# Altium PCB BEE-PC_EXP_V100.PcbDoc (part 6 of 7)
Units mm, origin at the board's own origin, x right, y up, seen from the top; angles counter-clockwise.
Board outline 180 x 79.98 mm, 6 copper layers (L1 TOP, L2 GND 1, L3 SIGNAL, L4 PWR, L5 GND 2, L6 BOT), stack 1.536 mm thick; 1146 components, 909 nets, 3933 pads, 1234 vias.
Unrouted connection lines stored in the file: 1783.
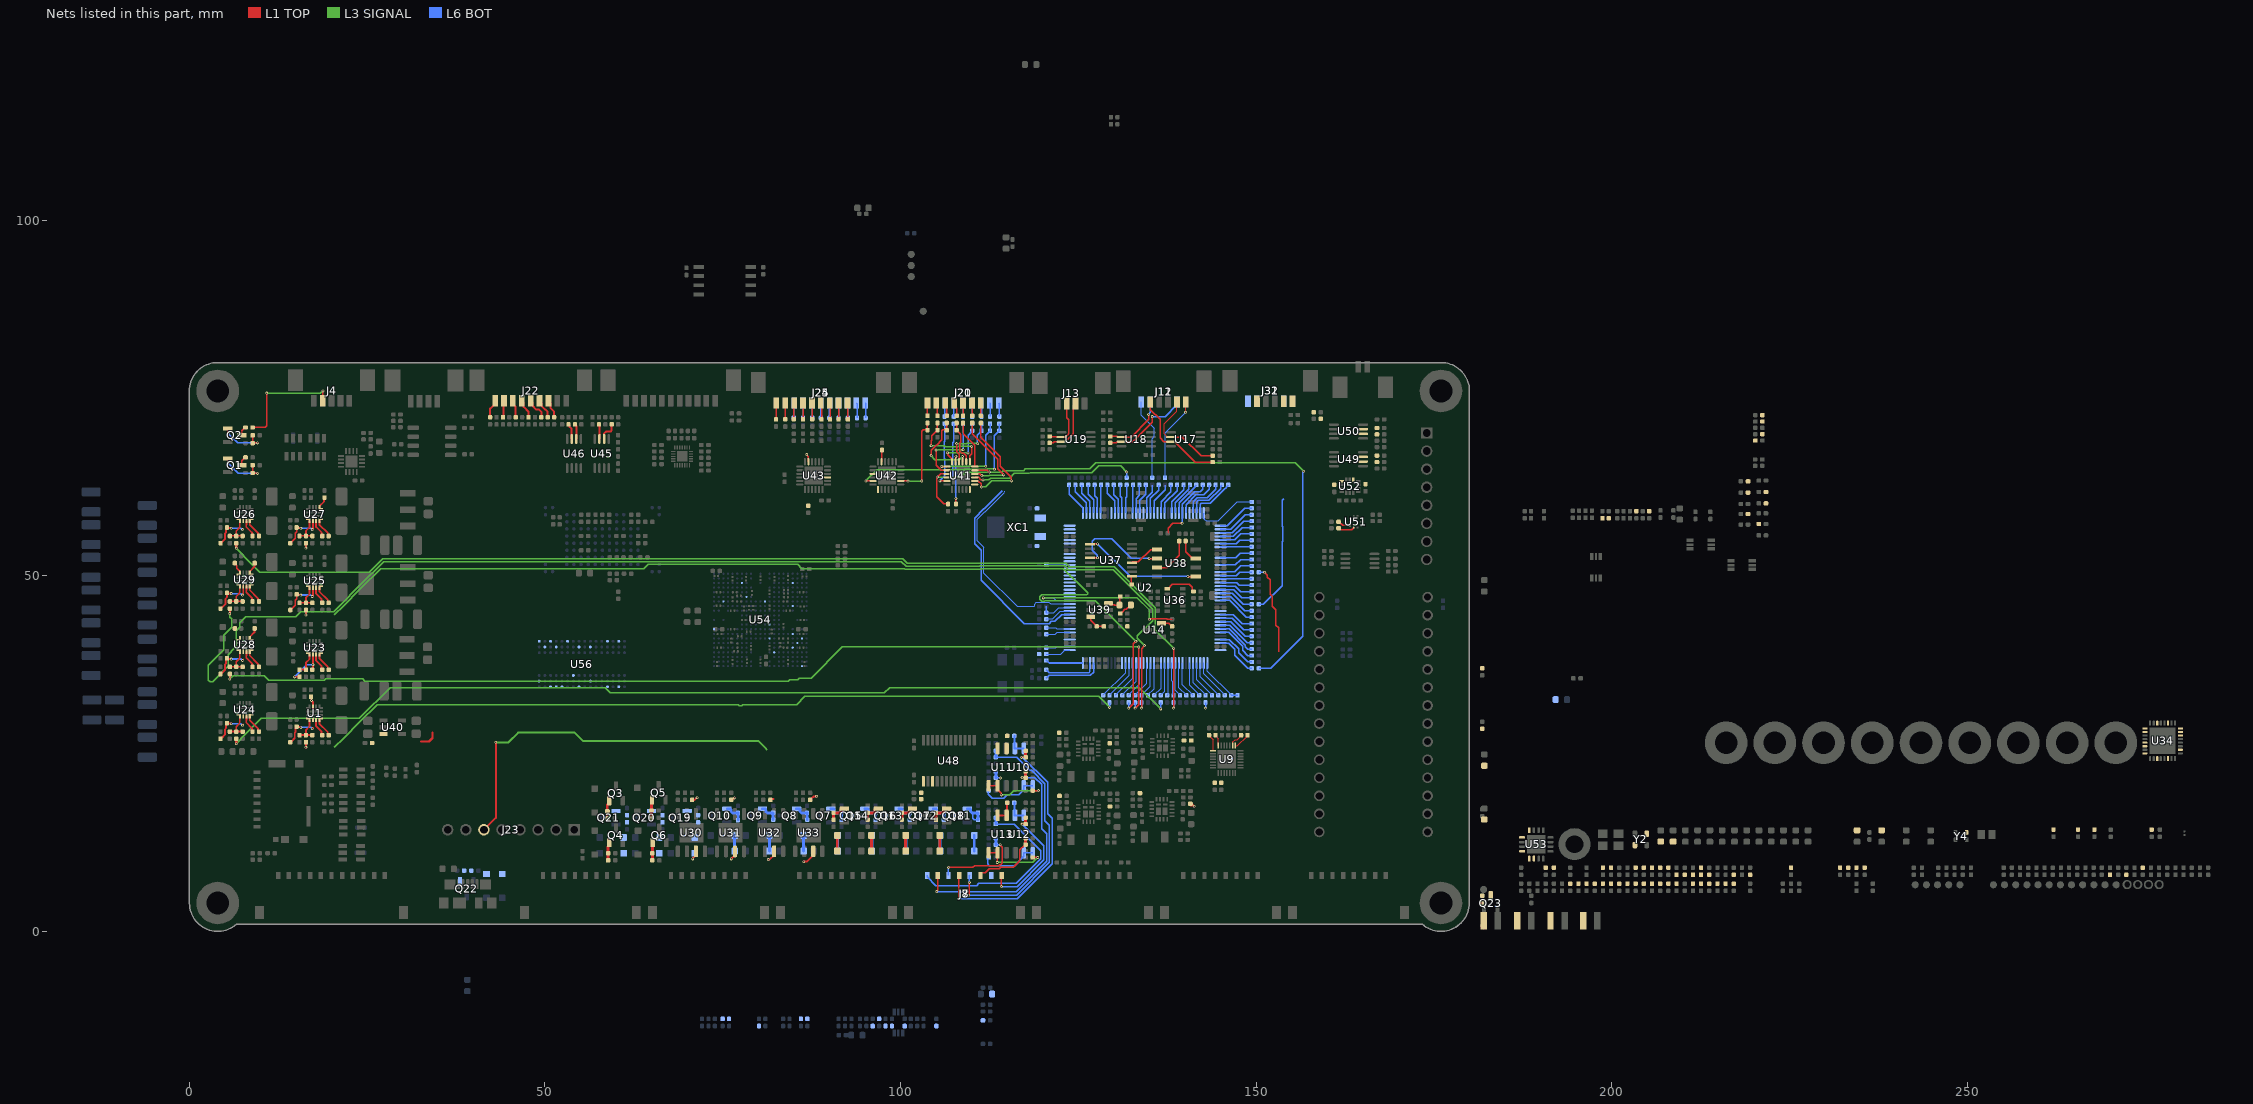
[diagram p6: the nets of this part, all layers, seen from the top]

## Via types
v1: diameter 0.6, hole 0.3, L1 TOP to L6 BOT, 563 vias
v2: diameter 0.4, hole 0.2, L1 TOP to L6 BOT, tented both sides, 344 vias
v3: diameter 0.4, hole 0.2, L1 TOP to L6 BOT, 327 vias

## Nets (pads, with @x,y where several pads share a name; then routed paths per layer and width w, separated by ;. In a path a pad name is that pad's centre, name@x,y a point inside that pad or via, vN(x,y) a via of type N, cw(c..) or ccw(c..) an arc to the next point about the centre after c; other vN are vias at no path point) (continued)
NetC167_2: C167.2 U27.7 | length 1.7
  L1 TOP w0.25: U27.7@18.308,59.609 18.333,59.634 18.333,59.833 18.954,60.454 18.954,60.929 C167.2@19,60.975
NetC168_2: C168.2 U28.10
NetC169_2: C169.2 U28.7 | length 1.7
  L1 TOP w0.25: U28.7@8.508,41.209 8.533,41.234 8.533,41.433 9.154,42.054 9.154,42.529 C169.2@9.2,42.575
NetC173_2: C173.2 U29.10 | length 1.7
  L1 TOP w0.25: C173.2@6.4,51.775 6.4,51.736 6.685,51.451 6.685,51.073 7.083,50.675 7.083,50.434 U29.10@7.108,50.409
NetC174_2: C174.2 U29.7 | length 1.7
  L1 TOP w0.25: U29.7@8.508,50.409 8.533,50.434 8.533,50.633 9.154,51.254 9.154,51.729 C174.2@9.2,51.775
NetC287_2: C287.2 R581.2
NetC288_1: C288.1 U34.24
NetC290_2: C290.2 R323.1 R394.1 R571.1 R581.1 U34.2 U54.J7
NetC292_2: C292.2 C294.2 U56.B2
NetC296_2: C296.2 U56.D9
NetC298_2: C298.2 U56.G7
NetC300_2: C300.2 U56.K8
NetC302_2: C302.2 U56.K2
NetC304_2: C304.2 U56.R9
NetC306_2: C306.2 U56.R1
NetC308_2: C308.2 U56.N9
NetC310_2: C310.2 U56.N1
NetC312_2: C312.2 U56.A1
NetC314_2: C314.2 U56.A8
NetC316_2: C316.2 U56.C1
NetC318_2: C318.2 U56.C9
NetC320_2: C320.2 U56.D2
NetC322_2: C322.2 U56.E9
NetC324_2: C324.2 U56.F1
NetC326_2: C326.2 U56.H2
NetC328_2: C328.2 C330.2 U56.H9
NetD17_2: D17.2 DZ1.2 | length 2.2
  L6 BOT w0.4: D17.2@91.181,11.303 DZ1.2@91.181,13.503
NetD18_2: D18.2 DZ2.2 | length 2.2
  L6 BOT w0.4: D18.2@86.381,11.303 DZ2.2@86.381,13.503
NetD19_2: D19.2 DZ3.2 | length 2.2
  L6 BOT w0.4: D19.2@81.581,11.303 DZ3.2@81.581,13.503
NetD20_2: D20.2 DZ4.2 | length 2.2
  L6 BOT w0.4: D20.2@76.681,11.303 DZ4.2@76.681,13.503
NetD21_2: D21.2 DZ5.2 | length 2.2
  L6 BOT w0.4: D21.2@110.381,11.303 DZ5.2@110.381,13.503
NetD22_2: D22.2 DZ6.2 | length 2.2
  L6 BOT w0.4: D22.2@105.581,11.303 DZ6.2@105.581,13.503
NetD23_2: D23.2 DZ7.2 | length 2.2
  L6 BOT w0.4: D23.2@100.781,11.303 DZ7.2@100.781,13.503
NetD24_2: D24.2 DZ8.2 | length 2.2
  L6 BOT w0.4: D24.2@95.981,11.303 DZ8.2@95.981,13.503
NetD25_2: D25.2 DZ9.2 | length 2.2
  L1 TOP w0.4: D25.2@91.119,11.303 DZ9.2@91.119,13.503
NetD26_2: D26.2 DZ10.2 | length 2.2
  L1 TOP w0.4: D26.2@95.919,11.303 DZ10.2@95.919,13.503
NetD27_2: D27.2 DZ11.2 | length 2.2
  L1 TOP w0.4: D27.2@100.719,11.303 DZ11.2@100.719,13.503
NetD28_2: D28.2 DZ12.2 | length 2.2
  L1 TOP w0.4: D28.2@105.519,11.303 DZ12.2@105.519,13.503
NetD29_2: D29.2 DZ13.2
NetD30_2: D30.2 DZ14.2
NetD31_2: D31.2 DZ15.2
NetD32_2: D32.2 DZ16.2
NetD33_1: D33.1 R166.2
NetD34_1: D34.1 R577.2
NetD35_1: D35.1 R579.2
NetJ4_4: J4.4 R92.2 | length 16.1
  L1 TOP w0.2: R92.2@8.925,70.864 10.664,70.864 10.9,71.1 v3(10.9,75.7) ; J4.4@18.75,74.6 18.8,74.65 v3(18.8,76)
  L3 SIGNAL w0.2: v3(10.9,75.7) 18.446,75.7 18.746,76 v3(18.8,76)
NetJ11_1: J11.1 R169.1 | length 11.8
  L1 TOP w0.15: v3(140.1,73) 140.1,74.425 J11.1@140.125,74.45
  L6 BOT w0.15: R169.1@137.2,63.825 137.2,70.1 v3(140.1,73)
NetJ11_2: J11.2 R172.2 U17.6 | length 13.3
  L1 TOP w0.15: U17.6@138.05,69.525 137.525,69.525 137.075,69.975 137.075,70.675 137.1,70.7 137.1,71.4 138.875,73.175 J11.2@138.875,74.45
  L1 TOP w0.2: U17.6@138.05,69.525 139.653,69.525 142.278,66.9 R172.2@143.875,66.9
NetJ11_5: J11.5 R173.2 U17.7 | length 14.4
  L1 TOP w0.2: J11.5@135.125,74.45 135.125,73.375 136.5,72 136.5,70.4 136.5,69.425 137.05,68.875 138.597,68.875 141.472,66 R173.2@143.875,66
NetJ12_1: J12.1 R179.1 | length 11.5
  L6 BOT w0.15: J12.1@133.875,74.45 133.875,72.575 135.7,70.75 135.7,69.6 135.4,69.3 R179.1@135.4,63.825
NetJ12_2: J12.2 R180.2 U18.6 | length 9
  L1 TOP w0.2: R180.2@129.525,69.6 130.462,69.6 130.537,69.525 U18.6@131.102,69.525 132.425,69.525 134.9,72 v3(134.9,72.7)
  L6 BOT w0.2: v3(134.9,72.7) 134.9,72.754 135.125,72.979 J12.2@135.125,74.45
NetJ12_5: J12.5 R181.2 U18.7 | length 12.4
  L1 TOP w0.2: R181.2@129.525,68.7 130.362,68.7 130.537,68.875 U18.7@131.102,68.875 132.675,68.875 135.4,71.6 v3(135.4,72.4)
  L6 BOT w0.2: v3(135.4,72.4) 137.225,72.4 138.875,74.05 J12.5@138.875,74.45
NetJ13_2: J13.2 R183.2 U19.7 | length 7.7
  L1 TOP w0.2: R183.2@121.007,68.7 121.478,68.7 121.65,68.872 122.647,68.872 U19.7@122.65,68.875 ; U19.7@123.197,68.875 124.301,69.979 124.301,72.941 124.319,72.959 124.319,73.944 J13.2@124.625,74.25
NetJ13_3: J13.3 R184.2 U19.6 | length 7.2
  L1 TOP w0.2: R184.2@121.007,69.6 121.054,69.554 123.168,69.554 123.197,69.525 123.65,69.978 123.65,71.939 123.375,72.214 J13.3@123.375,74.25
NetJ20_3: J20.3 R408.2 | length 1.9
  L6 BOT w0.2: R408.2@106.2,72.425 106.2,74.2 J20.3@106.3,74.3
NetJ20_4: J20.4 R410.2 | length 1.9
  L6 BOT w0.2: R410.2@107.5,72.425 107.5,74.25 J20.4@107.55,74.3
NetJ20_5: J20.5 R412.2 | length 1.9
  L6 BOT w0.2: R412.2@108.8,72.425 J20.5@108.8,74.3
NetJ20_6: J20.6 R414.2 | length 1.9
  L6 BOT w0.2: J20.6@110.05,74.3 110.1,74.25 R414.2@110.1,72.425
NetJ20_7: J20.7 R416.2 | length 1.9
  L6 BOT w0.2: J20.7@111.3,74.3 111.4,74.2 R416.2@111.4,72.425
NetJ20_8: J20.8 R418.2 | length 1.9
  L6 BOT w0.2: J20.8@112.55,74.3 112.6,74.25 R418.2@112.6,72.425
NetJ20_9: J20.9 R420.2 | length 1.9
  L6 BOT w0.2: J20.9@113.8,74.3 113.9,74.2 R420.2@113.9,72.425
NetJ21_3: J21.3 R409.2 | length 1.8
  L1 TOP w0.2: R409.2@111.3,72.525 J21.3@111.3,74.3
NetJ21_4: J21.4 R411.2 | length 1.8
  L1 TOP w0.2: J21.4@110.05,74.3 110.1,74.25 R411.2@110.1,72.525
NetJ21_5: J21.5 R413.2 | length 1.8
  L1 TOP w0.2: R413.2@108.8,72.525 J21.5@108.8,74.3
NetJ21_6: J21.6 R415.2 | length 1.9
  L1 TOP w0.2: J21.6@107.55,74.3 107.55,73.9 107.9,73.55 R415.2@107.9,72.525
NetJ21_7: J21.7 R417.2 | length 1.9
  L1 TOP w0.2: J21.7@106.3,74.3 106.5,74.1 R417.2@106.5,72.525
NetJ21_8: J21.8 R419.2 | length 1.8
  L1 TOP w0.2: J21.8@105.05,74.3 105.2,74.15 R419.2@105.2,72.525
NetJ21_9: J21.9 R421.2 | length 1.8
  L1 TOP w0.2: R421.2@103.8,72.525 J21.9@103.8,74.3
NetJ22_3: J22.3 R307.2 | length 2.6
  L1 TOP w0.28: J22.3@50.5,74.6 50.76,74.34 50.76,73.61 51.3,73.07 R307.2@51.3,72.325
NetJ22_4: J22.4 R309.2 | length 2.8
  L1 TOP w0.28: J22.4@49.25,74.6 49.51,74.34 49.51,73.909 50.055,73.365 50.105,73.365 50.4,73.07 R309.2@50.4,72.325
NetJ22_5: J22.5 R311.2 | length 3.1
  L1 TOP w0.28: J22.5@48,74.6 48.26,74.34 48.26,73.909 48.805,73.365 49.205,73.365 49.5,73.07 R311.2@49.5,72.325
NetJ22_6: J22.6 R313.2 | length 2.7
  L1 TOP w0.28: J22.6@46.75,74.6 47.01,74.34 47.01,73.76 47.7,73.07 R313.2@47.7,72.325
NetJ22_7: J22.7 R315.2 | length 2.4
  L1 TOP w0.28: J22.7@45.5,74.6 45.5,74.2 45.9,73.8 R315.2@45.9,72.325
NetJ22_8: J22.8 R316.2 | length 2.3
  L1 TOP w0.28: R316.2@44.1,72.325 44.175,72.4 44.175,74.525 J22.8@44.25,74.6
NetJ22_9: J22.9 R317.2 | length 2.6
  L1 TOP w0.28: R317.2@42.3,72.325 42.3,73.5 43,74.2 J22.9@43,74.6
NetJ24_3: J24.3 R431.2 | length 2.3
  L1 TOP w0.2: J24.3@92.55,74.3 92.6,74.25 R431.2@92.6,72.025
NetJ24_4: J24.4 R433.2 | length 2.3
  L1 TOP w0.2: R433.2@91.3,72.025 J24.4@91.3,74.3
NetJ24_5: J24.5 R435.2 | length 2.3
  L1 TOP w0.2: J24.5@90.05,74.3 90.1,74.25 R435.2@90.1,72.025
NetJ24_6: J24.6 R437.2 | length 2.3
  L1 TOP w0.2: J24.6@88.8,74.3 88.9,74.2 R437.2@88.9,72.025
NetJ24_7: J24.7 R439.2 | length 2.3
  L1 TOP w0.2: J24.7@87.55,74.3 87.6,74.25 R439.2@87.6,72.025
NetJ24_8: J24.8 R441.2 | length 2.3
  L1 TOP w0.2: R441.2@86.3,72.025 J24.8@86.3,74.3
NetJ24_9: J24.9 R443.2 | length 2.3
  L1 TOP w0.2: R443.2@85,72.025 85,74.25 J24.9@85.05,74.3
NetJ24_10: J24.10 R445.2 | length 2.3
  L1 TOP w0.2: R445.2@83.8,72.025 J24.10@83.8,74.3
NetJ24_11: J24.11 R447.2 | length 2.3
  L1 TOP w0.2: R447.2@82.5,72.025 82.5,74.25 J24.11@82.55,74.3
NetJ25_3: J25.3 R432.2 | length 2.1
  L6 BOT w0.2: R432.2@85,72.225 85,74.25 J25.3@85.05,74.3
NetJ25_4: J25.4 R434.2 | length 2.1
  L6 BOT w0.2: R434.2@86.3,72.225 J25.4@86.3,74.3
NetJ25_5: J25.5 R436.2 | length 2.1
  L6 BOT w0.2: J25.5@87.55,74.3 87.6,74.25 R436.2@87.6,72.225
NetJ25_6: J25.6 R438.2 | length 2.1
  L6 BOT w0.2: R438.2@88.8,72.225 J25.6@88.8,74.3
NetJ25_7: J25.7 R440.2 | length 2.1
  L6 BOT w0.2: R440.2@90,72.225 90,74.25 J25.7@90.05,74.3
NetJ25_8: J25.8 R442.2 | length 2.1
  L6 BOT w0.2: R442.2@91.3,72.225 J25.8@91.3,74.3
NetJ25_9: J25.9 R444.2 | length 2.1
  L6 BOT w0.2: J25.9@92.55,74.3 92.6,74.25 R444.2@92.6,72.225
NetJ25_10: J25.10 R446.2 | length 2.1
  L6 BOT w0.2: J25.10@93.8,74.3 93.9,74.2 R446.2@93.9,72.225
NetJ25_11: J25.11 R448.2 | length 2.1
  L6 BOT w0.2: J25.11@95.05,74.3 95.1,74.25 R448.2@95.1,72.225
NetJ31_1: J31.1 R81.1
NetJ31_2: J31.2 R101.2 U49.6
NetJ31_5: J31.5 R102.2 U49.7
NetJ32_1: J32.1 R112.1
NetJ32_2: J32.2 R505.2 U50.6
NetJ32_5: J32.5 R506.2 U50.7
NetJP12_1: JP12.1 R401.2 | length 2
  L1 TOP w0.2: R401.2@130.875,44.7 130.927,44.7 131.127,44.9 131.164,44.9 131.564,45.3 131.775,45.3 JP12.1@132.375,45.9
NetJP12_2: JP12.2 R402.2 U39.3 | length 2.9
  L1 TOP w0.2: U39.3@129.255,46.15 129.45,45.955 130.045,45.955 130.1,45.9 130.825,45.9 130.85,45.925 130.85,47.075 R402.2@130.875,47.1
NetL5_1: L5.1 U34.11
NetL6_1: L6.1 U34.14
NetL7_1: L7.1 U34.27
NetL8_1: L8.1 U34.30
NetQ1_1: Q1.1 R85.2 R86.2 | length 7.3
  L1 TOP w0.2: v3(5.4,65.9) Q1.1@5.4,66.514 ; R86.2@8.875,65.564 8.9,65.539 8.9,64.489 8.925,64.464 8.957,64.432 9.568,64.432 v3(9.6,64.4)
  L6 BOT w0.2: v3(5.4,65.9) 6.9,64.4 v3(9.6,64.4)
NetQ1_3: Q1.3 R87.1 | length 1.3
  L1 TOP w0.2: Q1.3@7.4,65.564 7.4,66.187 7.875,66.662 R87.1@7.875,66.664
NetQ2_1: Q2.1 R90.2 R91.2 | length 7.2
  L1 TOP w0.2: Q2.1@5.4,70.714 5.4,70.154 5.5,70.054 v3(5.5,70) ; R91.2@8.875,69.764 8.9,69.739 8.9,68.689 8.925,68.664 8.943,68.682 9.582,68.682 v3(9.6,68.7)
  L6 BOT w0.2: v3(5.5,70) 6.8,68.7 v3(9.6,68.7)
NetQ2_3: Q2.3 R92.1 | length 1.3
  L1 TOP w0.2: Q2.3@7.4,69.764 7.4,70.387 7.875,70.862 R92.1@7.875,70.864
NetQ3_1: Q3.1 R125.2 R126.2 | length 2.6
  L1 TOP w0.4: R125.2@58.775,15.9 58.775,16.9 58.775,17.765 59.05,18.04 Q3.1@59.05,18.4
NetQ4_1: Q4.1 R127.2 R128.2 | length 2.6
  L1 TOP w0.4: R127.2@58.875,10 58.875,11.965 58.95,12.04 58.95,12.4 Q4.1@59.05,12.5
NetQ5_1: Q5.1 R129.2 R130.2 | length 2.5
  L1 TOP w0.4: R129.2@64.975,16 65.013,16.038 65.013,18.463 Q5.1@65.05,18.5
NetQ6_1: Q6.1 R131.2 R132.2 | length 2.5
  L1 TOP w0.4: R131.2@65.075,10 65.113,10.038 65.113,12.463 Q6.1@65.15,12.5
NetQ7_1: Q7.1 R479.1 R483.2 | length 2.8
  L6 BOT w0.4: Q7.1@90.2,17.25 90.56,17.25 90.66,17.15 90.66,16.909 90.894,16.675 91.7,16.675 R483.2@91.7,15.725
NetQ8_1: Q8.1 R480.1 R484.2 | length 2.8
  L6 BOT w0.4: Q8.1@85.4,17.25 85.76,17.25 85.86,17.15 85.86,16.909 86.094,16.675 86.9,16.675 R484.2@86.9,15.725
NetQ9_1: Q9.1 R481.1 R485.2 | length 2.8
  L6 BOT w0.4: Q9.1@80.6,17.25 80.96,17.25 81.06,17.15 81.06,16.909 81.294,16.675 82.1,16.675 R485.2@82.1,15.725
NetQ10_1: Q10.1 R482.1 R486.2 | length 2.8
  L6 BOT w0.4: Q10.1@75.7,17.25 76.06,17.25 76.16,17.15 76.16,16.909 76.394,16.675 77.2,16.675 R486.2@77.2,15.725
NetQ11_1: Q11.1 R487.1 R491.2 | length 5
  L6 BOT w0.2: R491.2@110.9,15.725 110.366,15.725 110.183,15.907 110.183,16.558 110.3,16.675 R487.1@110.9,16.675
  L6 BOT w0.4: Q11.1@109.4,17.25 109.76,17.25 109.86,17.15 109.86,16.909 110.094,16.675 110.9,16.675 R491.2@110.9,15.725
NetQ12_1: Q12.1 R488.1 R492.2 | length 2.8
  L6 BOT w0.4: Q12.1@104.6,17.25 104.96,17.25 105.06,17.15 105.06,16.909 105.294,16.675 106.1,16.675 R492.2@106.1,15.725
NetQ13_1: Q13.1 R489.1 R493.2 | length 2.8
  L6 BOT w0.4: Q13.1@99.8,17.25 100.16,17.25 100.26,17.15 100.26,16.909 100.494,16.675 101.3,16.675 R493.2@101.3,15.725
NetQ14_1: Q14.1 R490.1 R494.2 | length 2.8
  L6 BOT w0.4: Q14.1@95,17.25 95.36,17.25 95.46,17.15 95.46,16.909 95.694,16.675 96.5,16.675 R494.2@96.5,15.725
NetQ15_1: Q15.1 R495.1 R499.2 | length 2.8
  L1 TOP w0.4: R499.2@90.6,15.725 90.6,16.675 91.406,16.675 91.64,16.909 91.64,17.15 91.74,17.25 Q15.1@92.1,17.25
NetQ16_1: Q16.1 R496.1 R500.2 | length 2.8
  L1 TOP w0.4: R500.2@95.4,15.725 95.4,16.675 96.206,16.675 96.44,16.909 96.44,17.15 96.54,17.25 Q16.1@96.9,17.25
NetQ17_1: Q17.1 R497.1 R501.2 | length 2.8
  L1 TOP w0.4: R501.2@100.2,15.725 100.2,16.675 101.006,16.675 101.24,16.909 101.24,17.15 101.34,17.25 Q17.1@101.7,17.25
NetQ18_1: Q18.1 R498.1 R502.2 | length 2.8
  L1 TOP w0.4: R502.2@105,15.725 105,16.675 105.806,16.675 106.04,16.909 106.04,17.15 106.14,17.25 Q18.1@106.5,17.25
NetQ19_1: Q19.1 R508.1 R512.2
NetQ20_1: Q20.1 R509.1 R513.2
NetQ21_1: Q21.1 R510.1 R514.2
NetQ22_1: Q22.1 R511.1 R515.2
NetQ23_3: Q23.3 R331.1 Y2.1
NetR1_1: R1.1 R6.2 U1.2 | length 5.1
  L1 TOP w0.25: 14.794,27.165 14.825,27.196 14.825,27.947 14.953,28.075 14.953,28.628 R1.1@15.1,28.775 ; R1.1@15.1,28.764 15.135,28.729 15.671,28.729 v2(15.7,28.7) ; v2(17.3,28.5) 17.3,28.541 v2@17.384,28.624
  L1 TOP w0.28: R6.2@14.2,26.575 14.2,26.595 14.38,26.775 14.404,26.775 14.794,27.165
  L6 BOT w0.25: v2(15.7,28.7) 17.059,28.7 17.259,28.5 v2(17.3,28.5)
NetR2_1: R2.1 U1.3 | length 2.5
  L1 TOP w0.25: U1.3@17.833,29.759 17.833,29.192 17.825,29.184 17.825,28.875 18.604,28.096 18.604,27.721 R2.1@18.7,27.625
NetR3_1: R3.1 U1.4 | length 2.7
  L1 TOP w0.25: U1.4@18.308,29.759 18.293,29.744 18.293,29.207 19.454,28.046 19.454,27.771 R3.1@19.6,27.625
NetR4_1: R4.1 R5.1 R7.1 U1.1 | length 4.2
  L1 TOP w0.25: R5.1@15.5,27.625 R4.1@16.4,27.625 ; U1.1@16.908,29.762 16.9,29.754 16.9,28.812 16.392,28.304 16.392,27.625 R7.1@17.3,27.625
NetR119_2: R119.2 U9.23 | length 2.1
  L1 TOP w0.15: U9.23@146.7,26.135 146.715,26.15 146.715,26.647 147.043,26.975 147.326,26.975 147.9,27.549 R119.2@147.9,27.575
NetR120_2: R120.2 U9.28 | length 1.6
  L1 TOP w0.15: R120.2@144.3,27.575 144.3,27.509 144.69,27.119 144.69,26.885 144.7,26.875 U9.28@144.7,26.135
NetR121_2: R121.2 U9.22 | length 2.3
  L1 TOP w0.15: U9.22@147.1,26.135 147.386,26.135 148.8,27.549 R121.2@148.8,27.575
NetR122_2: R122.2 U9.1 | length 2.4
  L1 TOP w0.15: R122.2@143.4,27.575 143.4,27.549 143.965,26.984 U9.1@143.965,25.4
NetR133_1: R133.1 U10.1 U10.2 | length 8
  L6 BOT w0.2: R133.1@112.375,19.8 112.375,19.3 112.925,18.75 114.489,18.75 114.989,19.25 116.645,19.25 117.335,19.94 U10.2@117.335,20.465 U10.1@118.605,20.465
NetR134_1: R134.1 U11.1 U11.2 | length 9
  L1 TOP w0.2: U11.1@112.395,20.465 U11.2@113.665,20.465 113.665,19.94 114.162,19.443 114.162,19.238 v3(114.2,19.2) ; R134.1@118.625,19.8 v3(119.4,19.8)
  L3 SIGNAL w0.2: v3(114.2,19.2) 115.364,19.2 115.964,19.8 v3(119.4,19.8)
NetR139_1: R139.1 U10.6 U10.7 | length 3
  L6 BOT w0.28: R139.1@116.025,27.5 116.045,27.48 U10.6@116.045,25.755 ; U10.6@116.065,25.735 U10.7@117.335,25.735
NetR140_1: R140.1 U11.6 U11.7
NetR145_1: R145.1 U12.1 U12.2 | length 8.5
  L6 BOT w0.2: R145.1@112.375,10.4 112.25,10.275 112.25,9.514 112.514,9.25 116.045,9.25 117.335,10.54 U12.2@117.335,11.065 U12.1@118.605,11.065
NetR146_1: R146.1 U13.1 U13.2 | length 9.3
  L1 TOP w0.2: U13.1@112.395,11.065 U13.2@113.665,11.065 113.632,11.032 113.632,9.733 v3(113.6,9.7) ; R146.1@118.625,10.4 v3(119.3,10.4)
  L3 SIGNAL w0.2: v3(113.6,9.7) 118.6,9.7 v3(119.3,10.4)
NetR151_1: R151.1 U12.6 U12.7 | length 3
  L6 BOT w0.28: R151.1@116.025,18.1 116.045,18.08 U12.6@116.045,16.355 ; U12.6@116.065,16.335 U12.7@117.335,16.335
NetR152_1: R152.1 U13.6 U13.7 | length 3.1
  L1 TOP w0.28: U13.7@113.665,16.335 U13.6@114.935,16.335 114.955,16.355 114.955,18.08 R152.1@114.975,18.1
NetR157_1: R157.1 U14.2 | length 1.7
  L1 TOP w0.2: U14.2@136.7,43.35 137.723,43.35 138.198,42.875 R157.1@138.2,42.875
NetR167_1: R167.1 U34.22
NetR217_1: R217.1 R220.2 U23.1 | length 3.2
  L1 TOP w0.25: R220.2@15.5,36.825 16.4,36.825 16.4,37.8 16.9,38.3 16.9,38.954 U23.1@16.908,38.962
NetR218_1: R218.1 U23.3 | length 2.5
  L1 TOP w0.25: U23.3@17.833,38.959 17.833,38.392 17.825,38.384 17.825,38.075 18.604,37.296 18.604,36.921 R218.1@18.7,36.825
NetR219_1: R219.1 U23.4 | length 2.7
  L1 TOP w0.25: U23.4@18.308,38.959 18.293,38.944 18.293,38.407 19.454,37.246 19.454,36.971 R219.1@19.6,36.825
NetR220_1: R220.1 R221.2 U23.2 | length 6.2
  L1 TOP w0.2: v3(14.8,35.8) 14.813,35.788 15.487,35.788 R220.1@15.5,35.775
  L1 TOP w0.25: R221.2@17.3,36.825 17.385,36.91 v3@17.385,37.505 ; U23.2@17.384,38.962 17.384,38.689 17.385,38.687 v3@17.385,37.505 ; v3(17.385,37.498) v3@17.385,37.505
  L6 BOT w0.2: v3(14.8,35.8) 16.498,37.498 v3(17.385,37.498)
NetR222_1: R222.1 R228.2 U24.2 | length 5.1
  L1 TOP w0.25: 4.994,27.665 5.025,27.696 5.025,28.447 5.153,28.575 5.153,29.117 R222.1@5.3,29.264 ; R222.1@5.3,29.275 R222.1@5.3,29.264 ; v2(5.9,29.2) 5.871,29.229 5.335,29.229 R222.1@5.3,29.264 ; v2(7.5,29) 7.5,29.041 v2@7.584,29.124
  L1 TOP w0.28: R228.2@4.4,27.075 4.4,27.095 4.58,27.275 4.604,27.275 4.994,27.665
  L6 BOT w0.25: v2(5.9,29.2) 7.259,29.2 7.459,29 v2(7.5,29)
NetR223_1: R223.1 U24.3 | length 2.5
  L1 TOP w0.25: U24.3@8.033,30.259 8.033,29.692 8.025,29.684 8.025,29.375 8.804,28.596 8.804,28.221 R223.1@8.9,28.125
NetR224_1: R224.1 U24.4 | length 2.7
  L1 TOP w0.25: U24.4@8.508,30.259 8.493,30.244 8.493,29.707 9.654,28.546 9.654,28.271 R224.1@9.8,28.125
NetR225_1: R225.1 R227.1 R229.1 U24.1 | length 4.2
  L1 TOP w0.25: R227.1@5.7,28.125 R225.1@6.6,28.125 ; U24.1@7.108,30.262 7.1,30.254 7.1,29.312 6.592,28.804 6.592,28.125 R229.1@7.5,28.125
NetR231_1: R231.1 R241.2 U25.2 | length 6.2
  L1 TOP w0.25: 14.828,45.8 14.885,45.857 ; 14.885,45.857 14.885,46.593 15.1,46.808 R231.1@15.1,47.345 ; R231.1@15.1,47.364 15.135,47.329 15.671,47.329 v2(15.7,47.3) ; v2(17.3,47.1) 17.3,47.141 17.384,47.224 U25.2@17.384,48.362
  L1 TOP w0.28: R241.2@14.2,45.175 14.2,45.195 14.38,45.375 14.404,45.375 14.828,45.8
  L6 BOT w0.25: v2(15.7,47.3) 17.059,47.3 17.259,47.1 v2(17.3,47.1)
NetR232_1: R232.1 R242.2 U26.2 | length 5.1
  L1 TOP w0.25: 4.994,55.165 5.025,55.196 5.025,55.947 5.153,56.075 5.153,56.617 R232.1@5.3,56.764 ; R232.1@5.3,56.775 R232.1@5.3,56.764 ; v2(5.9,56.7) 5.871,56.729 5.335,56.729 R232.1@5.3,56.764 ; v2(7.5,56.5) 7.5,56.541 v2@7.584,56.624
  L1 TOP w0.28: R242.2@4.4,54.575 4.4,54.595 4.58,54.775 4.604,54.775 4.994,55.165
  L6 BOT w0.25: v2(5.9,56.7) 7.259,56.7 7.459,56.5 v2(7.5,56.5)
NetR233_1: R233.1 U25.3 | length 2.5
  L1 TOP w0.25: U25.3@17.833,48.359 17.833,47.792 17.825,47.784 17.825,47.475 18.604,46.696 18.604,46.321 R233.1@18.7,46.225
NetR234_1: R234.1 U25.4 | length 2.7
  L1 TOP w0.25: U25.4@18.308,48.359 18.293,48.344 18.293,47.807 19.454,46.646 19.454,46.371 R234.1@19.6,46.225
NetR235_1: R235.1 U26.3 | length 2.5
  L1 TOP w0.25: U26.3@8.033,57.759 8.033,57.192 8.025,57.184 8.025,56.875 8.804,56.096 8.804,55.721 R235.1@8.9,55.625
NetR236_1: R236.1 U26.4 | length 2.7
  L1 TOP w0.25: U26.4@8.508,57.759 8.493,57.744 8.493,57.207 9.654,56.046 9.654,55.771 R236.1@9.8,55.625
NetR237_1: R237.1 R239.1 R243.1 U25.1 | length 4.2
  L1 TOP w0.25: R239.1@15.5,46.225 R237.1@16.4,46.225 ; U25.1@16.908,48.362 16.9,48.354 16.9,47.412 16.392,46.904 16.392,46.225 R243.1@17.3,46.225
NetR238_1: R238.1 R240.1 R244.1 U26.1 | length 4.2
  L1 TOP w0.25: R240.1@5.7,55.625 R238.1@6.6,55.625 ; U26.1@7.108,57.762 7.1,57.754 7.1,56.812 6.592,56.304 6.592,55.625 R244.1@7.5,55.625
NetR247_1: R247.1 R254.2 U27.2 | length 6.2
  L1 TOP w0.25: 14.828,55.2 14.885,55.257 14.885,55.993 15.1,56.208 R247.1@15.1,56.745 ; R247.1@15.1,56.764 15.135,56.729 15.671,56.729 v2(15.7,56.7) ; v2(17.3,56.5) 17.3,56.541 17.384,56.624 U27.2@17.384,57.762
  L1 TOP w0.28: R254.2@14.2,54.575 14.2,54.595 14.38,54.775 14.404,54.775 14.828,55.2
  L6 BOT w0.25: v2(15.7,56.7) 17.059,56.7 17.259,56.5 v2(17.3,56.5)
NetR248_1: R248.1 U27.3 | length 2.5
  L1 TOP w0.25: U27.3@17.833,57.759 17.833,57.192 17.825,57.184 17.825,56.875 18.604,56.096 18.604,55.721 R248.1@18.7,55.625
NetR249_1: R249.1 U27.4 | length 2.7
  L1 TOP w0.25: U27.4@18.308,57.759 18.293,57.744 18.293,57.207 19.454,56.046 19.454,55.771 R249.1@19.6,55.625
NetR250_1: R250.1 R251.1 R255.1 U27.1 | length 4.2
  L1 TOP w0.25: R251.1@15.5,55.625 R250.1@16.4,55.625 ; U27.1@16.908,57.762 16.9,57.754 16.9,56.812 16.392,56.304 16.392,55.625 R255.1@17.3,55.625
NetR252_1: R252.1 R258.1 R259.1 U28.1 | length 4.2
  L1 TOP w0.25: R258.1@5.7,37.225 R252.1@6.6,37.225 ; U28.1@7.108,39.362 7.1,39.354 7.1,38.412 6.592,37.904 6.592,37.225 R259.1@7.5,37.225
NetR253_1: R253.1 R260.2 U28.2 | length 5.1
  L1 TOP w0.25: 4.994,36.765 5.025,36.796 5.025,37.547 5.153,37.675 5.153,38.228 5.3,38.375 5.346,38.329 5.871,38.329 v2(5.9,38.3) ; v2(7.5,38.1) 7.5,38.141 v2@7.584,38.224
  L1 TOP w0.28: R260.2@4.4,36.175 4.4,36.195 4.58,36.375 4.604,36.375 4.994,36.765
  L6 BOT w0.25: v2(5.9,38.3) 7.259,38.3 7.459,38.1 v2(7.5,38.1)
NetR256_1: R256.1 U28.3 | length 2.5
  L1 TOP w0.25: U28.3@8.033,39.359 8.033,38.792 8.025,38.784 8.025,38.475 8.804,37.696 8.804,37.321 R256.1@8.9,37.225
NetR257_1: R257.1 U28.4 | length 2.7
  L1 TOP w0.25: U28.4@8.508,39.359 8.493,39.344 8.493,38.807 9.654,37.646 9.654,37.371 R257.1@9.8,37.225
NetR263_1: R263.1 R267.1 R268.1 U29.1 | length 4.2
  L1 TOP w0.25: R267.1@5.7,46.425 R263.1@6.6,46.425 ; U29.1@7.108,48.562 7.1,48.554 7.1,47.612 6.592,47.104 6.592,46.425 R268.1@7.5,46.425
NetR264_1: R264.1 R269.2 U29.2 | length 6.2
  L1 TOP w0.25: 5.028,46 5.085,46.057 5.085,46.793 5.3,47.008 R264.1@5.3,47.545 ; R264.1@5.3,47.564 5.335,47.529 5.871,47.529 v2(5.9,47.5) ; v2(7.5,47.3) 7.5,47.341 7.584,47.424 U29.2@7.584,48.562
  L1 TOP w0.28: R269.2@4.4,45.375 4.4,45.395 4.58,45.575 4.604,45.575 5.028,46
  L6 BOT w0.25: v2(5.9,47.5) 7.259,47.5 7.459,47.3 v2(7.5,47.3)
NetR265_1: R265.1 U29.3 | length 2.5
  L1 TOP w0.25: U29.3@8.033,48.559 8.033,47.992 8.025,47.984 8.025,47.675 8.804,46.896 8.804,46.521 R265.1@8.9,46.425
NetR266_1: R266.1 U29.4 | length 2.7
  L1 TOP w0.25: U29.4@8.508,48.559 8.493,48.544 8.493,48.007 9.654,46.846 9.654,46.571 R266.1@9.8,46.425
NetR273_1: R273.1 U30.7 | length 1.9
  L1 TOP w0.28: v3(70.8,10.2) 70.823,10.223 70.823,10.324 71.235,10.736 U30.7@71.235,11.265 ; R273.1@70.9,18.463 71.03,18.463 71.368,18.8 v3(71.4,18.8)
NetR276_1: R276.1 U31.7 | length 1.9
  L1 TOP w0.28: R276.1@76.175,18.442 76.305,18.442 76.643,18.779 v3(76.675,18.779) ; v3(76.2,10.2) 76.204,10.2 76.735,10.731 U31.7@76.735,11.253
NetR279_1: R279.1 U32.7 | length 2.2
  L1 TOP w0.28: v3(81.4,10.1) 81.423,10.123 81.618,10.123 82.235,10.74 U32.7@82.235,11.265 ; R279.1@81.65,18.475 81.795,18.62 82.177,18.62
NetR282_1: R282.1 U33.7 | length 3.4
  L1 TOP w0.28: v3(86.4,9.8) 86.423,9.823 86.818,9.823 87.735,10.74 U33.7@87.735,11.265 ; R282.1@87.26,18.569 87.345,18.654 87.459,18.654 87.782,18.977 88.177,18.977 v3(88.2,19)
NetR295_1: R295.1 U40.3 | length 2.5
  L1 TOP w0.3: 32.625,26.7 33.7,26.7 34.2,27.2 34.2,27.95
NetR296_1: R296.1 U34.23
NetR304_2: R304.2 U34.8
NetR305_2: R305.2 U53.4
NetR310_2: R310.2 U53.5
NetR312_2: R312.2 U53.16
NetR314_2: R314.2 U41.17 | length 7.4
  L1 TOP w0.2: U41.17@107.75,66.051 107.766,66.067 107.766,66.766 v3(107.8,66.8) ; R314.2@107.8,60.125 v3(107.8,60.9)
  L6 BOT w0.2: v3(107.8,60.9) v3(107.8,66.8)
NetR318_2: R318.2 U53.1 U54.D5
NetR320_1: R320.1 U53.6
NetR324_1: R324.1 U34.1 U54.D19
NetR325_1: R325.1 U34.5
NetR327_1: R327.1 U34.6
NetR328_1: R328.1 R329.2 U34.18
NetR338_2: R338.2 U54.C6
NetR339_1: R339.1 U54.H4
NetR340_1: R340.1 U54.AA9
NetR343_1: R343.1 U54.W15
NetR344_2: R344.2 U54.D8
NetR347_2: R347.2 U54.B7
NetR348_1: R348.1 U54.P16
NetR350_1: R350.1 U54.K15
NetR352_1: R352.1 U54.J10
NetR354_1: R354.1 U54.D14
NetR358_2: R358.2 U54.R19
NetR359_1: R359.1 Y2.3
NetR363_1: R363.1 Y4.3
NetR393_1: R393.1 U36.1 | length 4.6
  L1 TOP w0.2: U36.1@137.5,48.2 137.65,48.2 138.25,48.8 140.6,48.8 141,48.4 141,47.975 R393.1@141.175,47.8
NetR395_1: R395.1 U38.7 | length 3.3
  L1 TOP w0.2: R395.1@140.1,54.875 140.1,53.408 141.073,52.435 U38.7@141.524,52.435
NetR396_1: R396.1 U38.3 | length 5.8
  L1 TOP w0.2: U38.3@136.076,51.165 137.465,51.165 139.2,52.9 R396.1@139.2,54.875
NetR398_1: R398.1 R400.2 U39.6 | length 2.7
  L1 TOP w0.2: U39.6@126.745,44.25 126.753,44.242 126.753,43.772 R398.1@127.625,42.9 ; R398.1@127.6,42.9 R400.2@128.575,42.9
NetR399_1: R399.1 U37.1 | length 1.2
  L1 TOP w0.2: R399.1@132.475,48.8 132.475,49.847 U37.1@132.553,49.925
NetR422_2: R422.2 U42.17 | length 1.6
  L1 TOP w0.2: U42.17@97.35,66.051 97.366,66.067 97.366,67.641 R422.2@97.4,67.675
NetR449_2: R449.2 U43.17 | length 1.1
  L1 TOP w0.2: v3(86.829,67.056) 86.829,67.002 87.05,66.78 U43.17@87.05,66.051
NetR460_1: R460.1 U45.7 | length 2.4
  L1 TOP w0.28: R460.1@57.6,71.275 57.535,71.21 57.675,71.07 U45.7@57.675,69.55 ; U45.7@57.675,69.55 U45.7@57.675,69.25 U45.7@57.675,69.55
NetR461_1: R461.1 U45.6 | length 2.8
  L1 TOP w0.28: U45.6@58.325,69.25 58.338,69.263 58.338,70.037 58.591,70.29 59.236,70.29 59.4,70.454 R461.1@59.4,71.275
NetR471_1: R471.1 U46.7 | length 2.2
  L1 TOP w0.28: R471.1@53.327,71.275 53.48,71.121 53.48,70.965 53.775,70.67 53.775,69.55 U46.7@53.775,69.25
NetR472_1: R472.1 U46.6 | length 2.4
  L1 TOP w0.28: U46.6@54.425,69.25 54.425,69.55 R472.1@54.425,71.046 ; R472.1@54.227,71.245 54.227,71.275 R472.1@54.227,71.245 ; R472.1@54.227,71.245 R472.1@54.425,71.046 ; R472.1@54.227,71.245 R472.1@54.425,71.046
NetR503_2: R503.2 U48.1
NetR504_2: R504.2 U48.3
NetR516_2: R516.2 U51.6 | length 2.4
  L1 TOP w0.2: R516.2@161.6,56.7 161.769,56.531 161.911,56.531 161.942,56.5 163.467,56.5 163.723,56.756 163.723,56.786 U51.6@163.75,56.813
NetR517_2: R517.2 R532.1 U51.5 | length 1.8
  L1 TOP w0.2: R517.2@161.6,57.6 161.642,57.6 161.942,57.3 161.961,57.3 162.161,57.1 U51.5@163.213,57.1
NetR518_2: R518.2 U52.12
NetR519_2: R519.2 R534.1 U52.1
NetR525_2: R525.2
NTC1-: J7.2 R135.1 R137.2 | length 1.5
  L6 BOT w0.2: R137.2@113.425,21.6 113.436,21.589 114.031,21.589 v3(114.042,21.579)
  L6 BOT w0.4: R137.2@113.425,21.6 R135.1@113.425,22.5
NTC2-: J7.4 R141.1 R143.2 | length 36.7
  L1 TOP w0.2: v3(109.6,5.1) 109.6,5.154 109.7,5.254 v3(109.7,6.9)
  L6 BOT w0.2: v3(109.6,5.1) 116.333,5.1 120.95,9.717 120.95,14.928 120.3,15.578 120.3,20.789 118.444,22.644 118.202,22.644 116.347,24.5 R143.2@113.425,24.5 ; v3(109.7,6.9) 109.7,7.82 J7.4@109.75,7.87
  L6 BOT w0.4: R143.2@113.425,24.5 R141.1@113.425,25.4
NTC3-: J7.6 R147.1 R149.2 | length 13
  L1 TOP w0.2: v3(106.764,9) 110.189,9 110.439,9.25 113.786,9.25 113.936,9.4 114.08,9.4 114.34,9.66 114.34,11.843 114.039,12.144 v3(114.039,12.181)
  L6 BOT w0.2: 106.7,8.8 106.75,8.75 J7.6@106.75,7.87 ; R149.2@113.425,12.2 113.435,12.19 114.029,12.19 v3(114.039,12.181)
  L6 BOT w0.4: R149.2@113.425,12.2 R147.1@113.425,13.1
NTC4-: J7.8 R153.1 R155.2 | length 28.2
  L6 BOT w0.2: J7.8@103.75,7.87 103.75,7.67 104.97,6.45 110.716,6.45 111.016,6.75 116.286,6.75 119.75,10.214 119.75,11.373 116.023,15.1 R155.2@113.425,15.1
  L6 BOT w0.4: R155.2@113.425,15.1 R153.1@113.425,16
NTC5-: J8.2 R136.1 R138.2 | length 35.2
  L1 TOP w0.2: v3(105.1,5.6) 105.1,5.654 105.25,5.804 J8.2@105.25,7.87 ; v3(117.095,21.626) 117.108,21.613 117.562,21.613 R138.2@117.575,21.6
  L1 TOP w0.4: R138.2@117.575,21.6 R136.1@117.575,22.5
  L6 BOT w0.2: v3(105.1,5.6) 116.268,5.6 120.55,9.882 120.55,13.754 119.85,14.454 119.85,20.673 118.897,21.626 v3(117.095,21.626)
NTC6-: J8.4 R142.1 R144.2 | length 36.8
  L1 TOP w0.2: v3(108.2,4.6) 108.2,7.82 J8.4@108.25,7.87 ; v3(117,24.483) 117.008,24.492 117.567,24.492 R144.2@117.575,24.5
  L1 TOP w0.4: R144.2@117.575,24.5 R142.1@117.575,25.4
  L6 BOT w0.2: v3(108.2,4.6) 116.399,4.6 121.35,9.551 121.35,15.918 120.7,16.568 120.7,20.954 117.209,24.445 117.038,24.445 v3(117,24.483)
NTC7-: J8.6 R148.1 R150.2 | length 10
  L1 TOP w0.2: J8.6@111.25,7.87 111.25,8.07 111.45,8.27 111.926,8.27 112.456,8.8 113.902,8.8 114.102,9 115.864,9 116.8,9.936 116.8,11.461 117.539,12.2 R150.2@117.575,12.2
  L1 TOP w0.4: R150.2@117.575,12.2 R148.1@117.575,13.1
NTC8-: J8.8 R154.1 R156.2 | length 16.8
  L1 TOP w0.2: v3(114.2,6.3) 114.2,7.82 J8.8@114.25,7.87 ; v3(117.1,15.1) R156.2@117.575,15.1
  L1 TOP w0.4: R156.2@117.575,15.1 R154.1@117.575,16
  L6 BOT w0.2: v3(114.2,6.3) 116.402,6.3 120.15,10.048 120.15,12.05 v3(117.1,15.1)
NTRST_PC25: C289.2 J23.6 R570.1 U54.B1 | length 52.6
  L1 TOP w0.28: J23.6@41.42,14.3 43.1,15.98 v3(43.1,26.6)
  L3 SIGNAL w0.28: v3(43.1,26.6) 44.888,26.6 46.236,27.948 50.578,27.948 50.583,27.953 54.2,27.953 55.344,26.809 79.984,26.809 81.127,25.666 81.127,25.623 81.15,25.6
PA00: R9.1 U2.102 | length 5.7
  L6 BOT w0.2: U2.102@145,42.55 146.216,42.55 148.507,40.259 148.507,40.043 148.85,39.7 R9.1@149.4,39.7
PA01: R10.1 U2.99 | length 5.1
  L6 BOT w0.2: U2.99@145,44.05 146.623,44.05 148.273,42.4 R10.1@149.4,42.4
PA02: R12.1 U2.93 | length 5.2
  L6 BOT w0.2: U2.93@145,47.05 146.473,47.05 148.423,45.1 R12.1@149.4,45.1
PA03: R13.1 U2.91 | length 4.9
  L6 BOT w0.2: U2.91@145,48.05 146.873,48.05 148.023,46.9 R13.1@149.4,46.9
PA04: R14.1 U2.77 | length 4.8
  L6 BOT w0.2: U2.77@145,55.05 147.023,55.05 147.873,55.9 R14.1@149.4,55.9
PA05: R15.1 U2.73 | length 5.4
  L6 BOT w0.2: U2.73@145,57.05 145.95,57.05 148.4,59.5 R15.1@149.375,59.5
PA06: R16.1 U2.114 | length 5.1
  L6 BOT w0.15: U2.114@140.65,37.75 140.65,34.601 142,33.251 R16.1@142,33.225
PA07_XIN32: C12.2 U2.35 XC1.1
PA08_XOUT32: C13.2 U2.36 XC1.2
PA09: R17.1 U2.75 | length 5.1
  L6 BOT w0.2: U2.75@145,56.05 146.623,56.05 148.273,57.7 R17.1@149.375,57.7
PA10: R18.1 U2.66 | length 5.9
  L6 BOT w0.2: U2.66@140.15,58.85 140.15,60.014 141.536,61.4 142.65,61.4 143.4,62.15 R18.1@143.4,62.775
PA11: R19.1 U2.64 | length 4.9
  L6 BOT w0.2: U2.64@139.15,58.85 139.169,58.869 139.169,59.596 139.2,59.627 139.2,60.286 141.3,62.386 141.3,62.423 141.6,62.723 R19.1@141.6,62.775
PA12: R21.1 U2.68 | length 6.1
  L6 BOT w0.2: U2.68@141.15,58.85 141.15,60.449 141.701,61 143.15,61 144.3,62.15 R21.1@144.3,62.775
PA13: R23.1 U2.42 | length 3.9
  L6 BOT w0.2: U2.42@128.15,58.85 128.169,58.869 128.169,62.744 R23.1@128.2,62.775
PA14: R24.1 U2.51 | length 3.9
  L6 BOT w0.2: U2.51@132.65,58.85 132.669,58.869 132.669,62.744 R24.1@132.7,62.775
PA15: R25.1 U2.49 | length 4
  L6 BOT w0.2: U2.49@131.65,58.85 131.65,61 131.8,61.15 R25.1@131.8,62.775
PA16: R54.1 U2.45
PA17: R27.1 U2.25 | length 3.3
  L6 BOT w0.15: R27.1@120.525,51.6 120.55,51.575 123.775,51.575 U2.25@123.8,51.55
PA18: C214.2 R99.1 U2.24
PA19: C215.2 R100.1 U2.23 | length 0.7
  L1 TOP w0.3: R100.1@140.675,17.9 140.825,17.75 141.123,17.75 141.273,17.6 v2(141.3,17.6)
PA20: C216.2 R104.1 U2.22
PA21: C217.2 R106.1 U2.32
PA22: R30.1 U2.37 | length 4.7
  L6 BOT w0.2: R30.1@123.7,62.775 123.7,61.5 125.617,59.583 125.617,58.883 U2.37@125.65,58.85
PA23: R32.1 U2.46 | length 4.4
  L6 BOT w0.2: R32.1@129.1,62.775 129.1,61.6 130.15,60.55 U2.46@130.15,58.85
PA24: R33.1 U2.56 | length 4.4
  L6 BOT w0.2: U2.56@135.15,58.85 135.15,60.915 136.3,62.065 R33.1@136.3,62.775
PA25: R34.1 U2.59 | length 4.5
  L6 BOT w0.2: U2.59@136.65,58.85 136.65,60.45 138,61.8 R34.1@138,62.775
PA26: R35.1 U2.62 | length 4.6
  L6 BOT w0.2: U2.62@138.15,58.85 138.15,60.45 139.8,62.1 R35.1@139.8,62.775
PA27: R36.1 U2.70 | length 6.3
  L6 BOT w0.2: U2.70@142.15,58.85 142.15,60.083 142.267,60.2 143.551,60.2 145.501,62.15 145.536,62.15 145.8,62.414 145.8,62.433 146.1,62.733 R36.1@146.1,62.775
PA28: R38.1 U2.112 | length 5.4
  L6 BOT w0.15: U2.112@141.65,37.75 141.65,35.401 143.8,33.251 R38.1@143.8,33.225
PA29: R40.1 U2.129 | length 5.3
  L6 BOT w0.15: R40.1@131.2,33.225 131.2,33.251 133.15,35.201 U2.129@133.15,37.75
PA30: R41.1 U2.116 | length 5.1
  L6 BOT w0.15: U2.116@139.65,37.75 139.65,34.701 141.1,33.251 R41.1@141.1,33.225
PA31: R42.1 U2.118 | length 4.8
  L6 BOT w0.15: U2.118@138.65,37.75 138.65,33.901 139.3,33.251 R42.1@139.3,33.225
PB00: C204.2 R297.2 U2.21
PB01: C205.2 R520.2 U2.20
PB02: C206.2 R521.2 U2.26
PB03: C207.2 R522.2 U2.31
PB04: R59.2 U2.105 | length 6
  L6 BOT w0.2: U2.105@145,41.05 146.216,41.05 147.533,39.733 147.533,39.217 148.85,37.9 R59.2@149.4,37.9
PB05: R60.2 R62.2 U2.109 | length 6.8
  L6 BOT w0.15: U2.109@143.15,37.75 143.15,36.601 146.5,33.251 R62.2@146.5,33.225
  L6 BOT w0.2: R62.2@146.5,33.225 R60.2@147.4,33.225
PB06: R61.2 U2.79 | length 4.4
  L6 BOT w0.2: U2.79@145,54.05 145.025,54.075 149.375,54.075 R61.2@149.4,54.1
PB07: R63.2 U2.89 | length 4.5
  L6 BOT w0.2: U2.89@145,49.05 147.287,49.05 147.638,48.7 R63.2@149.4,48.7
PB08: R64.2 U2.141 | length 8.3
  L6 BOT w0.2: R64.2@120.525,35.6 120.925,36 126.699,36 127.15,36.451 U2.141@127.15,37.75
PB09: R66.2 U2.142 | length 7.6
  L6 BOT w0.2: R66.2@120.525,36.8 120.925,36.4 126.533,36.4 126.65,36.517 U2.142@126.65,37.75
PB12: R166.1 U2.87 | length 17.4
  L1 TOP w0.2: v3(151.2,50.5) 151.6,50.1 151.6,49.836 152,49.436 152,47.402 152.3,47.102 152.3,45.697 152.775,45.222 152.775,43.088 153.175,42.688 153.175,39.3
  L6 BOT w0.2: U2.87@145,50.05 147.238,50.05 147.687,50.5 149.4,50.5 ; R166.1@150.45,50.5 v3(151.2,50.5)
PB13: U2.144 | length 5.3
  L6 BOT w0.22: 120.525,38.1 120.572,38.1 120.922,37.75 U2.144@125.65,37.75
PC00: U2.11 U43.9 | length 30.1
  L6 BOT w0.2: 114.314,61.986 114.314,61.949 114.065,61.7 111.769,59.404 111.719,59.404 110.45,58.135 110.45,54.509 111.325,53.634 111.325,49.409 117.434,43.3 120.886,43.3 121.186,43.6 121.723,43.6 122.654,44.531 123.781,44.531 U2.11@123.8,44.55
PC01: R47.1 U2.38 | length 4.6
  L6 BOT w0.2: R47.1@124.6,62.775 124.6,61.85 126.15,60.3 U2.38@126.15,58.85
PC02: R48.1 U2.39 | length 4.4
  L6 BOT w0.2: R48.1@125.5,62.775 125.5,61.65 126.65,60.5 U2.39@126.65,58.85
PC03: R49.1 U2.40 | length 4.2
  L6 BOT w0.2: R49.1@126.4,62.775 126.4,61.45 127.15,60.7 U2.40@127.15,58.85
PC04: R50.1 U2.41 | length 4.1
  L6 BOT w0.2: R50.1@127.3,62.775 127.3,61.25 127.65,60.9 U2.41@127.65,58.85
PC05: U2.58
PC06: U2.54
PC07: R53.1 U2.48 | length 4
  L6 BOT w0.2: R53.1@130.9,62.775 130.9,61.2 131.15,60.95 U2.48@131.15,58.85
PC08: U2.82 | length 4.7
  L6 BOT w0.2: U2.82@145,52.55 147.138,52.55 147.787,53.2 149.4,53.2
PC09: R55.1 U2.86 | length 4.8
  L6 BOT w0.2: U2.86@145,50.55 147.023,50.55 147.873,51.4 R55.1@149.4,51.4
PC10: R57.1 U2.90 | length 4.7
  L6 BOT w0.2: U2.90@145,48.55 147.073,48.55 147.823,47.8 R57.1@149.4,47.8
PC11: R58.1 U2.94 | length 5.4
  L6 BOT w0.2: U2.94@145,46.55 146.273,46.55 148.623,44.2 R58.1@149.4,44.2
PC12: U2.17
PC13: C218.2 R523.1 U2.19
PC14: U2.97
PC15: C219.2 R524.1 U2.18
PC16: R65.1 U2.100 | length 5.2
  L6 BOT w0.2: U2.100@145,43.55 146.423,43.55 148.473,41.5 R65.1@149.4,41.5
PC17: R67.1 U2.103 | length 6.1
  L6 BOT w0.2: U2.103@145,42.05 146.15,42.05 148.107,40.093 148.107,39.543 148.85,38.8 R67.1@149.4,38.8
PC18: R68.1 U2.111 | length 5.6
  L6 BOT w0.15: U2.111@142.15,37.75 142.15,35.801 144.7,33.251 R68.1@144.7,33.225
PC19: R69.1 U2.117 | length 5
  L6 BOT w0.15: U2.117@139.15,37.75 139.15,34.301 140.2,33.251 R69.1@140.2,33.225
PC20: R70.1 U2.120 | length 4.6
  L6 BOT w0.15: R70.1@137.5,33.225 137.621,33.346 137.621,37.721 U2.120@137.65,37.75
PC21: R71.1 U2.122 | length 4.9
  L6 BOT w0.15: R71.1@135.7,33.225 135.7,33.251 136.65,34.201 U2.122@136.65,37.75
PC22: R72.1 U2.124 | length 4.9
  L6 BOT w0.15: R72.1@134.8,33.225 134.8,33.251 135.65,34.101 U2.124@135.65,37.75
PC23: U2.127
PC24: R74.1 U2.130 | length 5.5
  L6 BOT w0.15: R74.1@130.3,33.225 130.3,33.251 132.65,35.601 U2.130@132.65,37.75
PC25: R525.1 U2.133
PC26: R76.1 U2.13 | length 4.5
  L6 BOT w0.15: R76.1@120.525,44.8 121.525,44.8 122.275,45.55 U2.13@123.8,45.55
  L6 BOT w0.2: R76.1@120.525,44.8 120.527,44.802 120.527,45.698 120.528,45.7
PC27: R77.1 U2.12 | length 3.8
  L6 BOT w0.15: R77.1@120.525,43.9 120.6,43.975 121.4,43.975 122.475,45.05 U2.12@123.8,45.05
PC28: R78.1 U2.76 | length 4.9
  L6 BOT w0.2: U2.76@145,55.55 146.823,55.55 148.073,56.8 R78.1@149.375,56.8
PC29: C208.2 R526.1 U2.16
PC30: C209.2 R527.1 U2.15 | length 24
  L1 TOP w0.22: v3(135,43.9) 135.049,43.9 135.109,43.96 137.444,43.96 137.479,43.925 138.2,43.925
  L3 SIGNAL w0.22: v3(120.07,46.9) 133.3,46.9 135,45.2 v3(135,43.9)
  L6 BOT w0.15: v3(120.07,46.9) 121.48,46.9 121.83,46.55 U2.15@123.8,46.55
PC31: C210.2 R528.1 U2.14 | length 28
  L6 BOT w0.15: 114.689,61.9 114.689,61.794 114.595,61.7 111.924,59.029 111.874,59.029 110.825,57.98 110.825,54.927 111.7,54.052 111.7,50.4 116.4,45.7 118.791,45.7 118.878,45.788 118.878,46.026 119.127,46.275 120.879,46.275 121.104,46.05 U2.14@123.8,46.05
PD00: R56.2 U2.1 | length 3.5
  L6 BOT w0.15: R56.2@120.525,39 122.55,39 123.1,39.55 U2.1@123.8,39.55
PD01: R11.2 U2.132 | length 5.8
  L6 BOT w0.15: R11.2@128.5,33.225 128.5,33.251 131.65,36.401 U2.132@131.65,37.75
PD02: R26.2 U2.131 | length 5.7
  L6 BOT w0.15: R26.2@129.4,33.225 129.4,33.251 132.15,36.001 U2.131@132.15,37.75
PD03: R51.2 U2.128 | length 5.2
  L6 BOT w0.15: R51.2@132.1,33.225 132.1,33.251 133.65,34.801 U2.128@133.65,37.75
PD04: R52.2 U2.126 | length 5.2
  L6 BOT w0.15: R52.2@133,33.225 133,33.251 134.65,34.901 U2.126@134.65,37.75
PD05: R73.2 U2.125 | length 5
  L6 BOT w0.15: R73.2@133.9,33.225 133.9,33.251 135.15,34.501 U2.125@135.15,37.75
PD06: R75.2 U2.121 | length 4.8
  L6 BOT w0.15: R75.2@136.6,33.225 136.6,33.251 137.15,33.801 U2.121@137.15,37.75
PD07: R185.2 U2.119 | length 4.6
  L6 BOT w0.15: U2.119@138.15,37.75 138.15,35.261 138.3,35.111 138.3,33.325 R185.2@138.4,33.225
PD08: R186.2 U2.113 | length 5.2
  L6 BOT w0.15: U2.113@141.15,37.75 141.15,35.001 142.9,33.251 R186.2@142.9,33.225
PD09: R283.2 U2.110 | length 5.7
  L6 BOT w0.15: U2.110@142.65,37.75 142.65,36.201 145.6,33.251 R283.2@145.6,33.225
PD10: R284.2 U2.101 | length 5.4
  L6 BOT w0.2: U2.101@145,43.05 146.325,43.05 148.775,40.6 R284.2@149.4,40.6
PD11: R20.2 U2.98 | length 4.9
  L6 BOT w0.2: U2.98@145,44.55 146.823,44.55 148.073,43.3 R20.2@149.4,43.3
PD12: R22.2 U2.92 | length 5
  L6 BOT w0.2: U2.92@145,47.55 146.673,47.55 148.223,46 R22.2@149.4,46
PD13: R285.2 U2.88 | length 4.4
  L6 BOT w0.2: U2.88@145,49.55 145.025,49.575 149.375,49.575 R285.2@149.4,49.6
PD14: R286.2 U2.84 | length 4.7
  L6 BOT w0.2: U2.84@145,51.55 147.073,51.55 147.823,52.3 R286.2@149.4,52.3
PD15: R287.2 U2.106 | length 6.4
  L6 BOT w0.2: U2.106@145,40.55 146.15,40.55 147.013,39.687 147.013,38.837 148.85,37 R287.2@149.4,37
PD16: R288.2 U2.78 | length 4.6
  L6 BOT w0.2: U2.78@145,54.55 147.238,54.55 147.687,55 R288.2@149.4,55
PD17: R289.2 U2.74 | length 5.2
  L6 BOT w0.2: U2.74@145,56.55 146.423,56.55 148.473,58.6 R289.2@149.375,58.6
PD18: R290.2 U2.69 | length 6.3
  L6 BOT w0.2: U2.69@141.65,58.85 141.65,60.383 141.867,60.6 143.366,60.6 145.031,62.265 145.031,62.554 145.2,62.723 R290.2@145.2,62.775
PD19: U2.67
PD20: R28.2 U2.65 | length 10
  L1 TOP w0.2: 137.625,56 137.625,56.725 138.3,57.4 v3(139.6,57.4)
  L6 BOT w0.2: v3(139.6,57.4) 139.6,57.9 139.631,57.931 139.631,58.831 U2.65@139.65,58.85 139.65,60.08 141.37,61.8 142.15,61.8 142.5,62.15 R28.2@142.5,62.775
PD21: R29.2 U2.63 | length 4.8
  L6 BOT w0.2: U2.63@138.65,58.85 138.65,60.302 140.531,62.183 140.531,62.606 R29.2@140.7,62.775
PD22: R31.2 U2.60 | length 4.6
  L6 BOT w0.2: U2.60@137.15,58.85 137.15,60.25 138.9,62 R31.2@138.9,62.775
PD23: R109.2 U2.57 | length 4.6
  L6 BOT w0.2: U2.57@135.65,58.85 135.65,60.56 137.2,62.11 137.2,62.775
PD24: R110.2 U2.55 | length 4.2
  L6 BOT w0.2: U2.55@134.65,58.85 134.65,60.98 135.4,61.73 135.4,62.775
PD25: R291.2 U2.52 | length 4.1
  L6 BOT w0.2: U2.52@133.15,58.85 133.15,60.85 133.6,61.3 R291.2@133.6,62.775
PD26: R292.2 U2.53 | length 4.3
  L6 BOT w0.2: U2.53@133.65,58.85 133.65,60.65 134.5,61.5 R292.2@134.5,62.775
PD27: R37.2 U2.47 | length 4.2
  L6 BOT w0.2: R37.2@130,62.775 130,61.4 130.65,60.75 U2.47@130.65,58.85
PD28: R39.2 U2.71 | length 8.7
  L6 BOT w0.15: U2.71@142.685,58.815 142.679,58.809 142.679,58.081 142.725,58.034 142.725,57.974 142.974,57.725 144.715,57.725 147.39,60.4 R39.2@149.375,60.4
PD29: R114.2 U2.108
PD30: R116.2 U2.34
PD31: R43.2 U2.2 | length 3.3
  L6 BOT w0.15: R43.2@120.525,39.9 121.825,39.9 121.975,40.05 U2.2@123.8,40.05
PE00: R8.2 U1.9 U2.4 | length 1.5
  L1 TOP w0.25: R8.2@17.1,32.975 17.156,32.919 17.156,32.501 17.214,32.443 17.214,32.418 17.384,32.248 U1.9@17.384,31.609
  other v2: 17.185,32.472
PE01: R293.2 U2.6 | length 3.4
  L6 BOT w0.15: R293.2@120.525,41.8 121.775,41.8 122.025,42.05 U2.6@123.8,42.05
PE02: C211.2 R294.2 U2.7 | length 3.3
  L6 BOT w0.15: R294.2@120.525,42.7 121.825,42.7 121.975,42.55 U2.7@123.8,42.55
PE03: C212.2 R123.2 U2.10
PE04: C213.2 R124.2 U2.27
PE05: U2.28
PHOTO1_ADC_CONV: R367.2 R418.1 U41.19 | length 13.2
  L1 TOP w0.2: v3(105.8,65.4) 105.834,65.366 106.533,65.366 U41.19@106.549,65.35
  L3 SIGNAL w0.2: v3(105.8,65.4) 105.811,65.411 111.989,65.411 v3(112,65.422)
  L6 BOT w0.2: v3(112,65.422) 112,69.8 R367.2@112.6,70.4 R418.1@112.6,71.375
PHOTO1_ADC_CS: R366.2 R416.1 U41.16 | length 8.8
  L1 TOP w0.2: v3(107.9,68.6) 107.9,67.435 108.25,67.085 U41.16@108.25,66.051
  L3 SIGNAL w0.2: v3(107.9,68.6) 109.316,68.6 109.366,68.65 110.728,68.65 110.806,68.572 v3(110.86,68.572)
  L6 BOT w0.2: v3@110.8,68.572 110.822,68.594 110.822,68.665 110.8,68.686 110.8,69.799 R366.2@111.4,70.4 R416.1@111.4,71.375
PHOTO1_ADC_EOC: R368.2 R420.1 U42.23 | length 26.5
  L1 TOP w0.2: v3(95.144,63.344) 95.147,63.347 96.146,63.347 U42.23@96.149,63.35
  L3 SIGNAL w0.2: v3(95.144,63.344) 96.75,64.95 108.984,64.95 109.007,64.972 112.186,64.972 112.264,65.05 113.096,65.05 113.146,65 v3(113.2,65)
  L6 BOT w0.2: v3(113.2,65) 113.2,69.7 R368.2@113.9,70.4 R420.1@113.9,71.375
PHOTO1_SPI_MISO: R412.1 U41.20 | length 11.4
  L1 TOP w0.2: v3(105,67.7) 105,65.564 105.714,64.85 U41.20@106.549,64.85
  L3 SIGNAL w0.2: v3(105,67.7) 106.364,67.7 106.414,67.75 108.788,67.75 v3(108.8,67.737)
  L6 BOT w0.2: v3(108.8,67.737) R412.1@108.8,71.375
PHOTO1_SPI_MOSI: R410.1 U41.22 | length 7.9
  L6 BOT w0.2: 107.4,63.6 107.35,63.65 107.35,68.686 107.5,68.836 R410.1@107.5,71.375
PHOTO1_SPI_nCS2: R365.2 R414.1 U41.18 | length 8.8
  L1 TOP w0.2: v3(106.6,67.3) 106.638,67.262 106.638,67.027 107.223,66.442 107.223,66.078 U41.18@107.25,66.051
  L3 SIGNAL w0.2: v3(106.6,67.3) 106.602,67.298 108.045,67.298 108.055,67.288 109.49,67.288 v3(109.5,67.298)
  L6 BOT w0.2: v3(109.5,67.298) 109.5,69.8 R365.2@110.1,70.4 R414.1@110.1,71.375
PHOTO1_SPI_SCK: R408.1 U41.23 | length 9.4
  L1 TOP w0.2: v3(105.544,63.358) 105.548,63.354 106.545,63.354 U41.23@106.549,63.35
  L6 BOT w0.2: v3(105.544,63.358) 106.25,64.064 106.25,66.451 106.15,66.551 106.15,68.884 106.2,68.934 R408.1@106.2,71.375
PHOTO2_ADC_CONV: R406.2 R419.1 U41.13 | length 11.6
  L1 TOP w0.2: v3@104.35,68.252 v3(104.315,68.287) 104.315,68.978 104.4,69.063 104.4,69.7 R406.2@105.2,70.5 R419.1@105.2,71.475 ; U41.13@109.75,66.051 109.75,66.911 110,67.161 v3(110,68.2)
  L3 SIGNAL w0.2: v3(104.315,68.287) 106.159,68.287 106.296,68.15 108.086,68.15 108.136,68.2 v3(110,68.2)
PHOTO2_ADC_CS: R405.2 R417.1 U41.15 | length 11.4
  L1 TOP w0.2: v3(104.3,66.9) 104.3,67.636 105.058,68.394 105.081,68.394 105.8,69.114 105.8,70.408 105.917,70.525 106.5,70.525 R417.1@106.5,71.475 ; v3(108.7,66.781) 108.734,66.747 108.734,66.067 U41.15@108.75,66.051
  L3 SIGNAL w0.2: v3(104.3,66.9) 104.85,66.35 108.269,66.35 v3(108.7,66.781)
PHOTO2_ADC_EOC: R407.2 R421.1 U42.8 | length 11.8
  L1 TOP w0.2: U42.8@100.051,63.35 100.063,63.339 101.045,63.339 v3(101.056,63.327) ; v3(103,63.342) 103,70.325 103.2,70.525 103.8,70.525 R421.1@103.8,71.475
  L3 SIGNAL w0.2: v3(101.056,63.327) 101.064,63.335 102.993,63.335 v3(103,63.342)
PHOTO2_SPI_MISO: R413.1 U41.12 | length 6.8
  L1 TOP w0.2: R413.1@108.8,71.475 108.8,70.1 108.9,70 108.9,69.936 110.45,68.386 U41.12@110.451,65.35 U41.12@110.451,65.35
PHOTO2_SPI_MOSI: R411.1 U41.10 | length 13.3
  L1 TOP w0.2: R411.1@110.1,71.475 110.1,69.968 113.65,66.418 113.65,65.05 v3(114.5,64.2) ; U41.10@110.451,64.35 110.467,64.334 111.168,64.334 111.402,64.1 v3(111.456,64.1)
  L3 SIGNAL w0.2: v3(111.456,64.1) 112.469,64.1 112.517,64.148 114.394,64.148 114.446,64.2 v3(114.5,64.2)
PHOTO2_SPI_nCS2: R403.2 R415.1 U41.14 | length 6.2
  L1 TOP w0.2: R415.1@107.9,71.475 R403.2@107.9,70.5 108.4,70 108.4,69.934 108.5,69.834 108.5,68.768 108.35,68.618 108.35,67.551 108.67,67.231 108.886,67.231 109.25,66.868 U41.14@109.25,66.051
PHOTO2_SPI_SCK: R409.1 U41.8 | length 16
  L1 TOP w0.2: U41.8@110.451,63.35 110.467,63.334 110.955,63.334 111.362,62.927 111.362,62.538 v3(111.4,62.5) ; R409.1@111.3,71.475 111.3,69.478 114.05,66.728 114.05,65.39 115.592,63.848 115.592,63.356 v3(115.6,63.348)
  L3 SIGNAL w0.2: v3(111.4,62.5) 112,62.5 112.848,63.348 v3(115.6,63.348)
PHOTO_ADC_CONV: R25.2 U41.9 | length 23.4
  L1 TOP w0.2: U41.9@110.451,63.85 110.467,63.834 111.02,63.834 111.316,63.538 111.562,63.538 v3(111.6,63.5)
  L3 SIGNAL w0.2: v3(111.6,63.5) 112.434,63.5 112.682,63.748 115.364,63.748 116.016,64.4 118.134,64.4 118.216,64.482 126.88,64.482 127.848,65.45 130.95,65.45 v3(131.8,64.6)
  L6 BOT w0.2: R25.2@131.8,63.825 v3(131.8,64.6)
PHOTO_ADC_CS: R56.1 U41.7
PHOTO_ADC_EOC: R99.2 U42.1
PHOTO_CHOSE: R174.2 R287.1 U41.11 U41.21 U42.21 | length 92.6
  L1 TOP w0.2: U41.21@106.549,64.35 105.65,64.35 v3(105.2,63.9) 105.2,63.846 105.094,63.74 105.094,61.156 106.1,60.15 106.675,60.15 R174.2@106.7,60.125 ; U41.11@110.451,64.85 112.196,64.85 112.446,64.6 v3(112.5,64.6)
  L3 SIGNAL w0.2: v3(105.2,63.9) 108.5,63.9 109.172,64.572 112.472,64.572 v3(112.5,64.6) 112.536,64.564 113,64.564 113.014,64.55 114.214,64.55 114.464,64.8 117.3,64.8 117.55,65.05 126.625,65.05 127.475,65.9 155.493,65.9 156.693,64.7 v3(156.7,64.7)
  L6 BOT w0.2: R287.1@150.45,37 152.1,37 156.6,41.5 156.6,61.7 156.6,64.546 156.7,64.646 v3(156.7,64.7)
PHOTO_SPI0_nCS2: R22.1 U41.6 | length 16.6
  L6 BOT w0.2: R22.1@150.45,46 151.025,46 153.658,48.633 153.658,54.793 153.75,54.885 153.75,56.915 153.658,57.007 153.658,60.597 153.874,60.813
POW_ONOFF_5V: R51.1 R237.2 | length 145.2
  L1 TOP w0.2: v3(132.1,31.4) 132.75,32.05 132.75,40.443 133.1,40.793 v3(133.1,40.8)
  L1 TOP w0.3: v2(16.4,44.5) R237.2@16.4,45.175
  L3 SIGNAL w0.2: 20.4,44.5 21.7,45.8 24,48.1 26.9,51 63.92,51 64.52,51.6 85.53,51.6 86.142,50.987 100.576,50.987 100.613,50.95 111.318,50.95 111.368,51 122.9,51 126.307,47.593 126.307,47.427 126.19,47.31 120.296,47.31 120.256,47.35 119.884,47.35 119.62,47.086 119.62,46.714 119.884,46.45 120.256,46.45 120.296,46.49 127.41,46.49 v3(133.1,40.8)
  L6 BOT w0.2: v3(132.1,31.4) R51.1@132.1,32.175
POW_ONOFF_HD4: R73.1 R267.2 | length 173
  L1 TOP w0.2: v3(133.9,31.4) 133.9,39.764 134.3,40.164 v3(134.3,40.2)
  L1 TOP w0.3: v2(5.7,44.7) R267.2@5.7,45.375
  L3 SIGNAL w0.2: v2(5.7,44.7) 5.7,44.195 5.959,43.935 5.959,43.3 5.959,42.779 5,41.82 4.85,41.67 4.85,39.577 2.7,37.427 2.7,35.334 2.934,35.1 3.266,35.1 5,36.834 5.45,37.284 5.45,38.935 6.317,39.801 6.317,39.851 6.573,40.107 6.573,42.261 7.088,42.776 7.088,43.3 7.088,43.396 7.941,44.25 14.938,44.25 15.638,44.95 20.284,44.95 21.134,45.8 24,48.666 27.334,52 100.129,52 100.779,51.35 111.152,51.35 111.202,51.4 123.066,51.4 123.616,50.85 129.93,50.85 135.45,45.33 135.45,43.714 133.286,41.55 133.286,41.25 134.3,40.236 v3(134.3,40.2)
  L6 BOT w0.2: v3(133.9,31.4) R73.1@133.9,32.175
POW_ONOFF_Laser: R186.1 R250.2 | length 1.5
  L1 TOP w0.3: v2(16.4,53.9) R250.2@16.4,54.575
  L6 BOT w0.2: v3(142.9,31.4) R186.1@142.9,32.175
POW_ONOFF_Photo: R185.1 R238.2 | length 151
  L1 TOP w0.2: v3(138.4,31.4) v3(138.4,39.8)
  L1 TOP w0.3: v2(6.6,53.9) R238.2@6.6,54.575
  L3 SIGNAL w0.2: v2(6.6,53.9) 7.643,52.857 7.643,52.779 7.922,52.5 9.907,50.515 10.2,50.515 18.8,50.515 24,50.515 25.284,50.515 27.169,52.4 100.295,52.4 100.945,51.75 110.986,51.75 111.036,51.8 123.231,51.8 123.781,51.25 130.096,51.25 135.85,45.496 135.85,42.35 v3(138.4,39.8)
  L6 BOT w0.2: v3(138.4,31.4) R185.1@138.4,32.175
POW_ONOFF_Solenoid: R75.1 R225.2 | length 136.7
  L1 TOP w0.3: v2(6.6,26.4) R225.2@6.6,27.075
  L3 SIGNAL w0.2: v2(6.6,26.4) 7.9,27.7 10.15,29.95 10.2,29.95 18.8,29.95 23.884,29.95 24,30.066 28.234,34.3 58.464,34.3 59.214,33.55 97.716,33.55 98.466,34.3 133.6,34.3 v3(136.6,31.3)
  L6 BOT w0.2: v3(136.6,31.3) R75.1@136.6,32.175
POW_ONOFF_SOM: R4.2 R26.1 | length 114.1
  L1 TOP w0.3: v2(16.4,25.9) R4.2@16.4,26.575
  L3 SIGNAL w0.2: 20.4,25.9 21.7,27.2 24,29.5 26.4,31.9 77.164,31.9 77.314,31.75 77.686,31.75 77.836,31.9 85.424,31.9 86.574,33.05 127.85,33.05 v3(129.4,31.5)
  L6 BOT w0.2: v3(129.4,31.5) R26.1@129.4,32.175
POW_ONOFF_TEC: R52.1 R258.2 | length 140.7
  L1 TOP w0.2: v3(133,31.4) 133.5,31.9 v3(133.5,40)
  L1 TOP w0.3: v2(5.7,35.5) R258.2@5.7,36.175
  L3 SIGNAL w0.2: v2(5.7,35.5) 6.15,35.95 10.2,35.95 10.571,35.95 11.171,35.35 18.986,35.35 19.186,35.55 24.371,35.55 24.706,35.215 84.213,35.215 84.398,35.4 85.53,35.4 85.745,35.615 87.442,35.615 91.827,40 v3(133.5,40)
  L6 BOT w0.2: v3(133,31.4) R52.1@133,32.175
PRAM_MISO: U37.12 U38.2 | length 14
  L1 TOP w0.2: U37.12@126.66,52.538 127.687,52.538 v3(127.7,52.55) ; v3(134.969,52.453) 134.987,52.435 U38.2@136.076,52.435
  L6 BOT w0.2: v3(127.7,52.55) 127.7,52.9 127,53.6 127,54.9 127.3,55.2 129.716,55.2 132.463,52.453 v3(134.969,52.453)
PRAM_MOSI: U37.9 U38.5 | length 16.9
  L1 TOP w0.2: U37.9@126.647,54.475 126.66,54.487 127.687,54.487 v3(127.7,54.5) ; v3(140.417,49.913) 140.435,49.895 U38.5@141.524,49.895
  L6 BOT w0.2: v3(127.7,54.5) 127.7,54.477 127.675,54.452 127.748,54.452 132.288,49.913 v3(140.417,49.913)
PRAM_nCS: U37.4 U38.1 | length 4.3
  L1 TOP w0.2: U37.4@132.553,51.875 132.631,51.953 133.453,51.953 135.163,53.663 136.034,53.663 U38.1@136.076,53.705